# Altium PCB PCB2.PcbDoc (part 2 of 2)
Units mm, origin at the board's own origin, x right, y up, seen from the top; angles counter-clockwise.
Board outline 65.4 x 65.4 mm, 4 copper layers (Top Layer, Internal Plane 1, Signal Layer 1, Bottom Layer), stack 0.778 mm thick; 122 components, 87 nets, 418 pads, 912 vias.
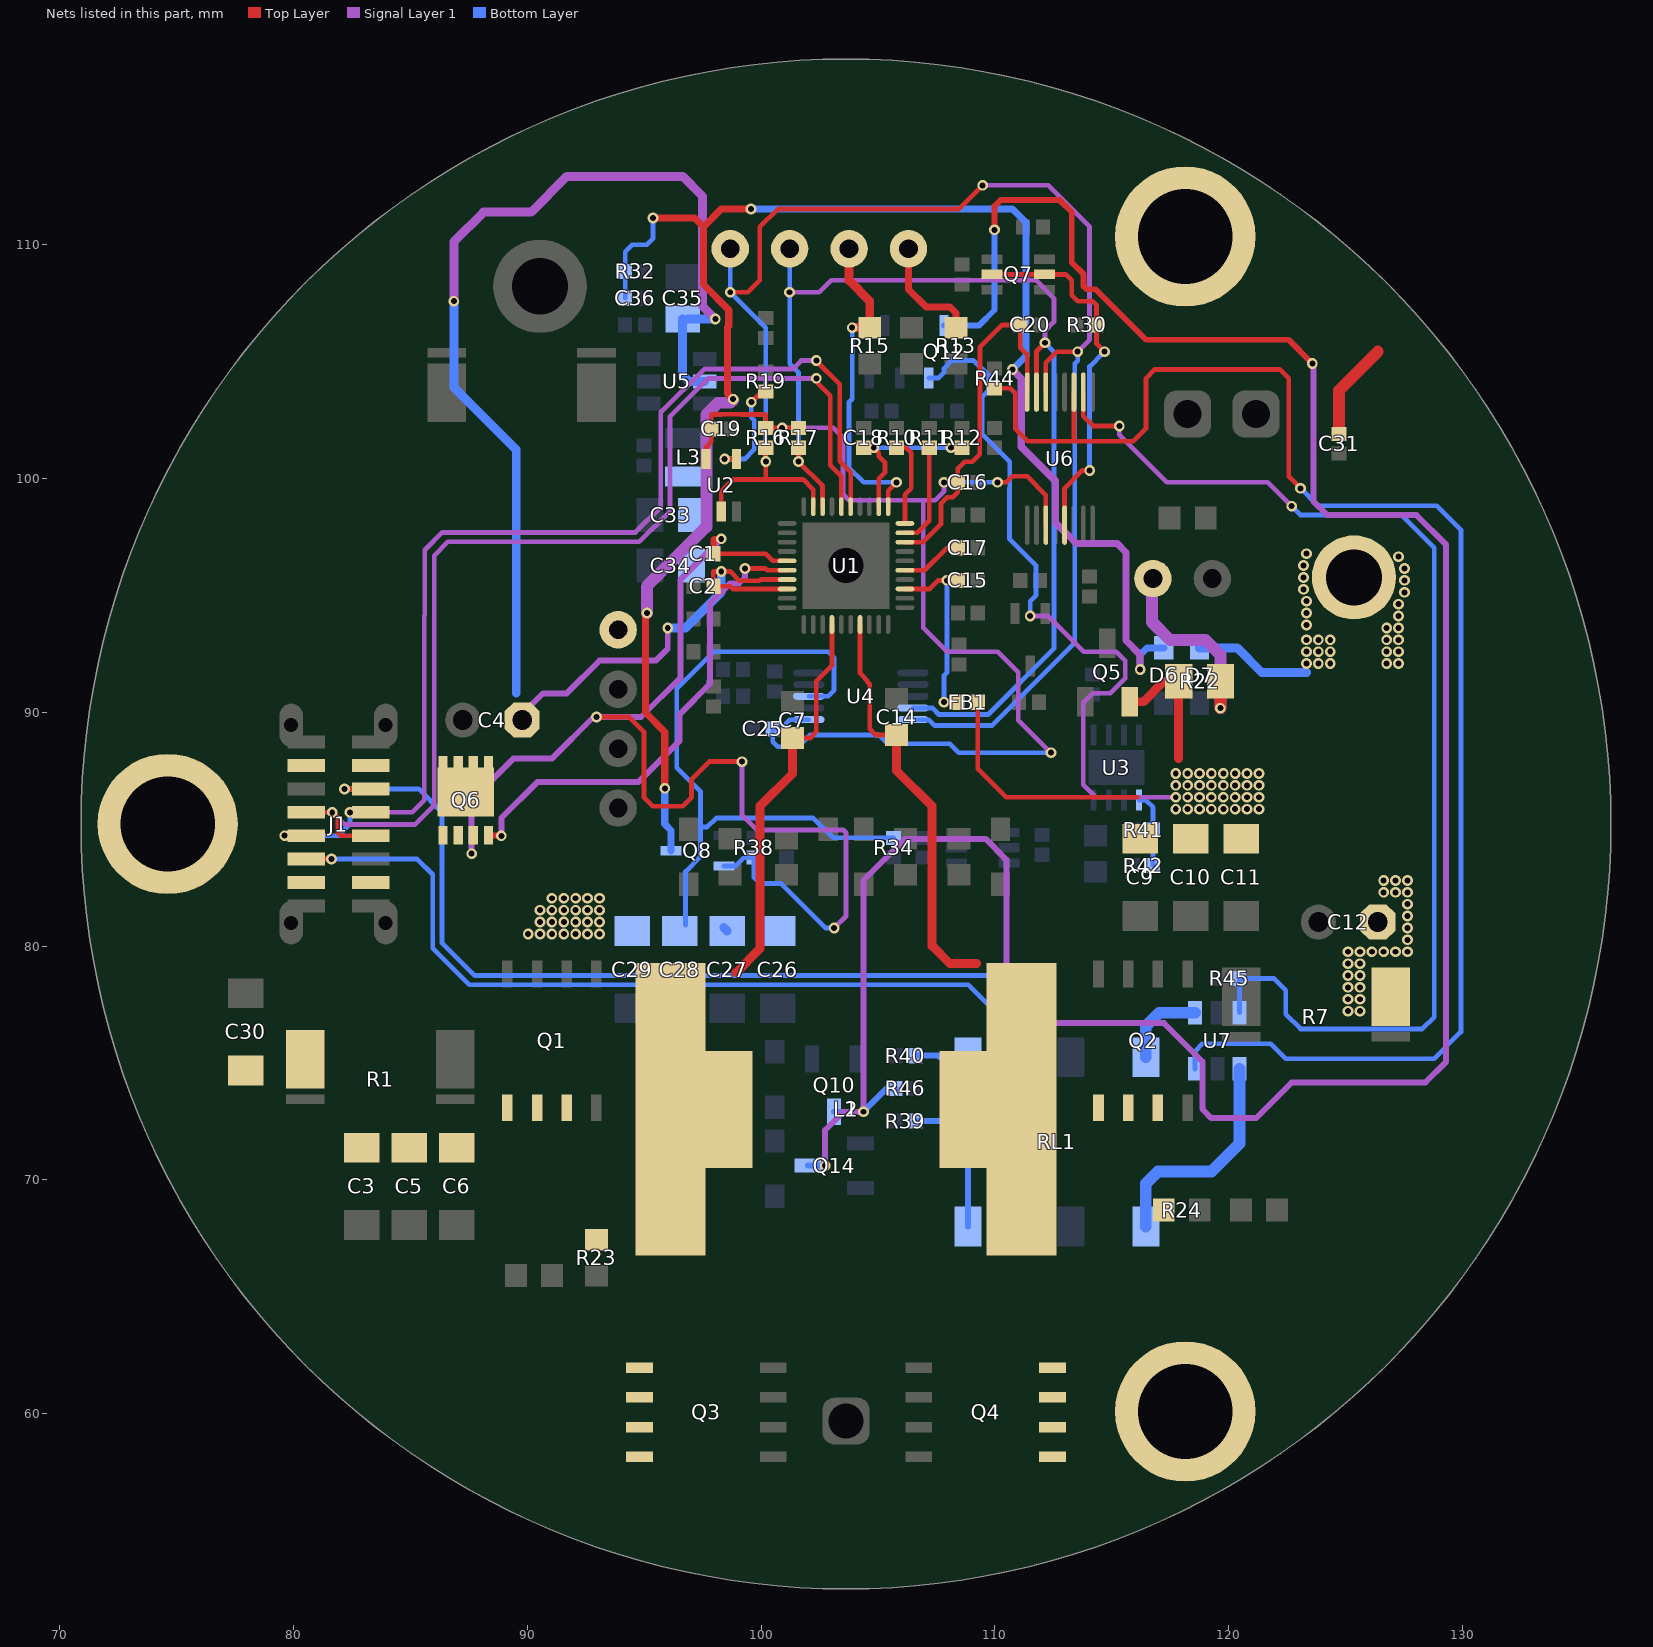
[diagram p4: the nets of this part, all layers, seen from the top]

## Via types
v1: diameter 0.457, hole 0.254, Top Layer to Bottom Layer, tented both sides, 912 vias

## Nets (pads, with @x,y where several pads share a name; then routed paths per layer and width w, separated by ;. In a path a pad name is that pad's centre, name@x,y a point inside that pad or via, vN(x,y) a via of type N, cw(c..) or ccw(c..) an arc to the next point about the centre after c; other vN are vias at no path point) (continued)
NetR19_1: R19.1 U2.4 | length 5
  Top Layer w0.203: v1(98.443,100.82) U2.4@98.948,100.82 ; v1(99.586,103.251) 100.203,103.868 R19.1@100.203,103.715
  Bottom Layer w0.203: v1(98.443,100.82) 99.296,100.82 99.713,101.237 99.713,102.471 99.586,102.598 v1(99.586,103.251)
NetR41_1: R41.1 R42.2 U3.5 | length 3.2
  Bottom Layer w0.203: U3.5@116.164,86.235 116.457,86.235 116.757,85.935 R42.2@116.757,83.439
NTC: C18.2 R12.2 U1.32 | length 7
  Top Layer w0.203: C18.2@104.394,101.302 v1(104.819,101.302) 105.035,101.086 105.035,100.936 105.296,100.675 105.296,100.239 105.035,99.978 105.035,98.789 U1.32@105.032,98.786 ; v1(108.121,101.302) R12.2@108.585,101.302
  Bottom Layer w0.203: v1(104.819,101.302) v1(108.121,101.302)
ODIS: Q10.3 Q12.3 Q14.3 R46.1 | length 112.7
  Top Layer w0.254: v1(109.982,110.617) 109.982,111.633 110.236,111.887 112.776,111.887 113.284,111.379 113.284,109.22 113.792,108.712 113.792,108.204 113.919,108.077 114.3,108.077 116.459,105.918 122.555,105.918 v1(123.571,104.902)
  Signal Layer 1 w0.254: v1(102.743,70.612) 102.743,72.136 103.523,72.916 v1(104.376,72.916) 104.376,82.803 106.155,84.582 109.601,84.582 110.49,83.693 110.49,77.978 111.76,76.708 117.221,76.708 118.872,75.057 118.872,73.025 119.253,72.644 121.158,72.644 122.682,74.168 128.397,74.168 129.286,75.057 129.286,97.155 128.016,98.425 124.206,98.425 123.614,99.017 123.614,104.859 v1(123.571,104.902)
  Bottom Layer w0.254: Q14.3@101.999,70.612 v1(102.743,70.612) ; Q10.3@103.124,72.916 v1(104.376,72.916) 105.374,73.914 R46.1@105.747,73.914 ; Q12.3@107.823,106.535 109.329,106.535 109.982,107.188 v1(109.982,110.617)
OEN: Q7.2 Q7.5 R30.1 U6.5 | length 15.8
  Top Layer w0.203: Q7.2@109.873,108.712 Q7.5@112.123,108.712 113.03,108.712 113.284,108.458 113.284,107.823 113.538,107.569 114.173,107.569 114.344,107.398 R30.1@114.344,106.553 114.344,105.747 v1(114.681,105.41) ; U6.5@112.976,97.994 112.976,99.57 113.736,100.33 v1(114.046,100.33)
  Bottom Layer w0.203: v1(114.046,100.33) 114.046,104.775 v1(114.681,105.41)
PMU_EN: pad.9 R13.2 | length 4.8
  Top Layer w0.305: pad.9@106.303,109.809 106.303,108.073 107.061,107.315 108.077,107.315 108.331,107.061 R13.2@108.331,106.434
PMU_INT: pad.8 R15.2 U1.31 | length 14
  Top Layer w0.203: U1.31@105.432,98.786 105.434,99.465 v1(105.791,99.822)
  Top Layer w0.381: pad.8@103.763,109.809 103.763,108.454 104.648,107.569 R15.2@104.648,106.434 v1(103.894,106.434)
  Bottom Layer w0.203: v1(103.894,106.434) 103.894,103.386 103.759,103.251 103.759,100.457 104.394,99.822 v1(105.791,99.822)
PMU_SCL: pad.6@98.683,109.809 R16.1 U1.39 U2.2 U4.5 U6.14 | length 65.7
  Top Layer w0.203: U2.2@98.298,98.57 98.298,99.441 98.806,99.949 101.798,99.949 102.232,99.515 U1.39@102.232,98.786 ; v1(98.683,107.95) 99.441,107.95 99.949,108.458 99.949,110.744 100.711,111.506 108.458,111.506 v1(109.474,112.522) ; 100.203,99.949 R16.1@100.203,101.302 ; U6.14@112.176,103.682 112.176,104.937 112.649,105.41 v1(113.538,105.41)
  Signal Layer 1 w0.203: v1(109.474,112.522) 112.268,112.522 114.046,110.744 114.046,105.918 v1(113.538,105.41)
  Bottom Layer w0.203: pad.6@98.683,109.809 v1(98.683,107.95) 100.203,106.43 v1(100.203,100.711) ; U4.5@106.492,89.678 107.172,89.678 107.424,89.426 109.873,89.426 113.411,92.964 113.411,104.902 113.538,105.029 v1(113.538,105.41)
PMU_SDA: pad.7 R17.1 U1.38 U4.4 U6.15 | length 48.9
  Top Layer w0.203: R17.1@101.6,101.302 v1(101.6,100.711) 102.632,99.679 U1.38@102.632,98.786 ; U6.15@111.776,103.682 111.776,105.426 v1(112.141,105.791)
  Signal Layer 1 w0.203: v1(101.219,107.95) 102.489,107.95 102.997,108.458 111.76,108.458 112.522,107.696 112.522,106.68 112.141,106.299 v1(112.141,105.791)
  Bottom Layer w0.203: pad.7@101.223,109.809 101.223,104.898 101.6,104.521 v1(101.6,100.711) ; U4.4@106.492,90.178 107.325,90.178 107.605,89.898 109.71,89.898 112.522,92.71 112.522,105.41 v1(112.141,105.791)
PSET: R10.2 U1.30 | length 3.9
  Top Layer w0.203: R10.2@105.791,101.302 106.216,101.302 106.426,101.092 106.426,99.568 106.152,99.294 U1.30@106.152,98.066
RDCC1: R39.1 RL1.4 | length 6.4
  Bottom Layer w0.254: R39.1@106.597,72.517 108.214,72.517 108.849,71.882 RL1.4@108.849,68.01
RDCC2: R40.1 RL1.5 | length 2.3
  Bottom Layer w0.254: R40.1@106.597,75.311 107.569,75.311 107.634,75.246 RL1.5@108.849,75.246
RESET: RL1.8 U7.1 | length 3.7
  Bottom Layer w0.508: RL1.8@116.449,75.246 116.449,76.571 117.024,77.146 U7.1@118.557,77.146
RLRESET: R44.2 U6.11 U7.6 | length 66.2
  Top Layer w0.203: R44.2@109.982,103.842 110.661,103.842 110.871,103.632 110.871,102.108 111.397,101.582 113.411,101.582 ; U6.11@113.376,103.682 113.376,101.617 113.411,101.582 ; v1(123.063,99.568) 122.555,100.076 122.555,104.267 122.174,104.648 116.84,104.648 116.459,104.267 116.459,102.126 115.915,101.582 113.411,101.582
  Bottom Layer w0.203: U7.6@118.557,74.746 118.557,75.504 118.872,75.819 121.793,75.819 122.428,75.184 128.778,75.184 129.921,76.327 129.921,97.79 128.887,98.824 123.807,98.824 v1(123.063,99.568)
RLSET: R45.2 U6.10 U7.3 | length 50.2
  Top Layer w0.203: U6.10@113.776,103.682 113.776,102.653 114.194,102.235 v1(115.316,102.235)
  Signal Layer 1 w0.203: v1(115.316,102.235) 115.316,101.854 117.348,99.822 121.666,99.822 v1(122.682,98.806)
  Bottom Layer w0.203: U7.3@120.44,77.163 U7.3@120.457,77.146 120.457,78.596 R45.2@120.44,78.613 121.92,78.613 122.428,78.105 122.428,77.089 123.063,76.454 128.27,76.454 128.778,76.962 128.778,97.028 127.381,98.425 123.063,98.425 v1(122.682,98.806)
SET: RL1.1 U7.4 | length 9.7
  Bottom Layer w0.508: RL1.1@116.449,68.01 116.449,69.84 116.967,70.358 119.253,70.358 120.457,71.562 U7.4@120.457,74.746
SW1: C7.2 L1.1 L2.1 Q1.1 Q1.2 Q1.3 Q3.5 Q3.6 Q3.7 Q3.8 R23.2 U1.14 | length 17
  Top Layer w0.203: C7.2@101.346,88.892 102.1,88.892 102.362,89.154 102.362,91.313 103.032,91.983 U1.14@103.032,93.746
  Top Layer w0.381: 98.933,78.867 99.949,79.883 99.949,85.979 101.346,87.376 C7.2@101.346,88.892
SW2: C14.1 L1.2 L2.2 Q2.1 Q2.2 Q2.3 Q4.5 Q4.6 Q4.7 Q4.8 R24.2 U1.17 | length 17.7
  Top Layer w0.203: U1.17@104.232,93.746 104.232,91.658 104.539,91.351 104.539,91.295 104.648,91.186 104.648,89.281 104.91,89.019 C14.1@105.791,89.019
  Top Layer w0.381: C14.1@105.791,89.019 105.791,87.503 107.315,85.979 107.315,80.01 108.077,79.248 109.22,79.248
TCC1: J1.A5 RL1.3 | length 43.6
  Top Layer w0.203: J1.A5@80.556,83.717 v1(81.637,83.717) v1@81.661,83.693
  Bottom Layer w0.203: v1(81.637,83.717) 85.302,83.717 85.961,83.058 85.961,79.901 87.521,78.341 108.857,78.341 109.982,77.216 109.982,72.898 111.049,71.831 RL1.3@111.049,68.01
TCC2: J1.B5 RL1.6 | length 39.3
  Top Layer w0.203: v1@82.169,86.741 v1(82.193,86.717) J1.B5@83.308,86.717
  Bottom Layer w0.203: v1(82.193,86.717) 85.368,86.717 86.36,85.725 86.36,80.137 87.757,78.74 109.728,78.74 111.049,77.419 RL1.6@111.049,75.246
USBN: J1.A7 J1.B7 U1.36 | length 46.9
  Top Layer w0.203: J1.A7@80.556,85.717 v1(81.669,85.717) 81.915,85.471 81.915,84.836 82.034,84.717 J1.B7@83.308,84.717 ; v1(102.362,104.267) 102.362,104.122 102.961,103.522 102.961,100.561 103.432,100.091 U1.36@103.432,98.786
  Signal Layer 1 w0.203: v1(81.669,85.717) 82.195,85.191 85.191,85.191 86.027,86.027 86.027,96.695 86.614,97.282 94.798,97.282 96.111,98.595 96.111,102.644 97.734,104.267 v1(102.362,104.267)
USBP: J1.A6 J1.B6 U1.35 | length 48.7
  Top Layer w0.203: v1(79.637,84.717) J1.A6@80.556,84.717 ; v1(82.431,85.717) J1.B6@83.308,85.717 ; v1(102.362,105.029) 102.362,105.011 103.36,104.012 103.36,100.727 103.831,100.256 103.831,98.787 U1.35@103.832,98.786
  Signal Layer 1 w0.203: v1(82.431,85.717) 85.082,85.717 85.598,86.233 85.598,94.125 85.628,94.155 85.628,96.931 86.378,97.681 94.633,97.681 95.712,98.76 95.712,102.809 97.569,104.666 101.346,104.666 101.709,105.029 v1(102.362,105.029)
  Bottom Layer w0.203: v1(79.637,84.717) 81.923,84.717 82.431,85.225 v1(82.431,85.717)
VBAT: C9.2 C10.2 C11.2 C12.1 D7.1 FB1.2 pad.11@125.349,95.758 Q5.2 Q12.2 R7.1 R22.1 | length 51.2
  Top Layer w0.203: FB1.2@109.264,90.424 109.264,87.586 110.49,86.36 116.078,86.36
  Top Layer w0.381: Q5.2@115.758,90.444 116.352,90.444 117.221,91.313 R22.1@117.855,91.313 117.855,88.012
  Signal Layer 1 w0.203: v1(111.506,94.107) 112.268,94.107 113.792,92.583 115.189,92.583 115.57,92.202 115.57,91.44 114.935,90.805 114.173,90.805 113.774,90.406 113.774,86.886 114.3,86.36 v1(117.729,86.36)
  Bottom Layer w0.203: Q12.2@107.173,104.285 107.587,104.285 107.823,104.521 107.823,104.705 108.15,105.032 108.836,105.032 108.839,105.029 109.093,105.029 109.728,104.394 109.728,103.759 109.456,103.487 109.456,101.872 110.635,100.693 110.635,99.586 110.617,99.569 110.617,97.409 111.76,96.266 111.76,94.996 111.506,94.742 v1(111.506,94.107)
  Bottom Layer w0.381: D7.1@118.745,92.747 120.359,92.747 121.412,91.694 123.317,91.694
  other v1: 125.095,77.216 125.603,77.216 125.095,77.724 125.603,77.724 125.095,78.232 125.603,78.232 125.095,78.74 125.603,78.74 125.095,79.248 125.603,79.248 125.095,79.756 125.603,79.756 126.111,79.756 126.619,79.756 127.127,79.756 127.635,79.756 127.635,80.264 127.635,80.772 127.635,81.28 127.635,81.788 126.619,82.296 127.127,82.296 127.635,82.296 126.619,82.804 127.127,82.804 127.635,82.804 117.729,85.852 118.237,85.852 118.745,85.852 119.253,85.852 119.761,85.852 120.269,85.852 120.777,85.852 121.285,85.852 118.237,86.36 118.745,86.36 119.253,86.36 119.761,86.36 120.269,86.36 120.777,86.36 121.285,86.36 117.729,86.868 118.237,86.868 118.745,86.868 119.253,86.868 119.761,86.868 120.269,86.868 120.777,86.868 121.285,86.868 117.729,87.376 118.237,87.376 118.745,87.376 119.253,87.376 119.761,87.376 120.269,87.376 120.777,87.376 121.285,87.376 123.317,92.075 123.825,92.075 124.333,92.075 126.746,92.075 127.254,92.075 123.317,92.583 123.825,92.583 124.333,92.583 126.746,92.583 127.254,92.583 123.317,93.091 123.825,93.091 124.333,93.091 126.746,93.091 127.254,93.091 126.746,93.599 127.254,93.599 123.317,93.726 127.254,94.107 123.317,94.234 127.254,94.615 123.317,94.742 127.508,95.123 123.19,95.25 127.508,95.631 123.19,95.758 127.508,96.139 123.19,96.266 127.254,96.647 123.317,96.774
VBIN: C15.2 FB1.1 U1.23 | length 8.3
  Top Layer w0.203: U1.23@106.152,95.266 107.204,95.266 107.569,95.631 v1(107.95,95.631) C15.2@108.414,95.631 ; v1(107.823,90.424) FB1.1@108.414,90.424
  Bottom Layer w0.203: v1(107.823,90.424) 107.823,91.567 107.95,91.694 v1(107.95,95.631)
VBUS: C2.2 C3.2 C4.1 C5.2 C6.2 C26.2 C27.2 C28.2 C29.2 C30.2 C35.2 Q6.5 Q6.6 Q6.7 Q6.8 R1.0 R34.2 U1.7 U1.8 U4.8 U5.5 | length 92.8
  Top Layer w0.203: U1.8@101.112,95.266 98.79,95.266 98.679,95.377 C2.2@97.961,95.377 97.961,96.012 98.679,96.012 99.078,95.613 99.931,95.613 99.984,95.666 U1.7@101.112,95.666
  Signal Layer 1 w0.254: C4.1@89.789,89.662 89.789,89.916 90.678,90.805 91.694,90.805 93.091,92.202 94.996,92.202 95.504,92.202 96.012,92.71 v1(96.012,93.599)
  Signal Layer 1 w0.381: v1(86.868,107.569) 86.868,110.109 88.138,111.379 90.17,111.379 91.694,112.903 96.647,112.903 97.497,112.053 97.497,107.354 v1(98.044,106.807)
  Bottom Layer w0.203: C28.2@96.774,80.899 96.774,83.185 97.409,83.82 97.409,85.09 97.703,85.09 98.084,85.471 102.235,85.471 103.08,84.626 R34.2@105.664,84.626 ; 97.409,84.201 97.409,86.614 96.393,87.63 96.393,90.995 96.965,91.567 96.972,91.567 97.988,92.583 102.87,92.583 103.124,92.329 103.124,90.932 102.87,90.678 U4.8@102.042,90.678
  Bottom Layer w0.381: v1(86.868,107.569) 86.868,103.886 89.535,101.219 89.535,90.805 ; v1(96.012,93.599) 96.774,93.599 98.298,95.123 v1(98.298,96.012) ; C35.2@96.647,106.806 96.647,104.394 96.901,104.14 U5.5@97.593,104.14 ; C35.2@96.901,106.806 96.902,106.807 v1(98.044,106.807) ; C27.2@98.407,80.79 C27.2@98.552,80.645
  other v1: 90.043,80.518 90.551,80.518 91.059,80.518 91.567,80.518 92.075,80.518 92.583,80.518 93.091,80.518 90.551,81.026 91.059,81.026 91.567,81.026 92.075,81.026 92.583,81.026 93.091,81.026 90.551,81.534 91.059,81.534 91.567,81.534 92.075,81.534 92.583,81.534 93.091,81.534 91.059,82.042 91.567,82.042 92.075,82.042 92.583,82.042 93.091,82.042
VBUSG: Q6.4 U1.6 | length 20.8
  Top Layer w0.203: v1(99.314,96.139) 100.203,96.139 100.276,96.066 U1.6@101.112,96.066
  Top Layer w0.254: Q6.4@88.351,84.733 v1@88.876,84.733
  Signal Layer 1 w0.254: v1(88.9,84.709) 88.9,85.471 90.451,87.022 94.769,87.022 96.52,88.773 96.52,89.916 97.816,91.212 97.816,94.641 98.679,95.504 99.06,95.504 99.314,95.758 v1(99.314,96.139)
VCASE: C31.2 pad.3 pad.4 pad.5 | length 4.2
  Top Layer w0.508: C31.2@124.714,101.898 124.714,103.759 126.365,105.41
VCC5V: C17.1 U1.25 | length 2.7
  Top Layer w0.203: U1.25@106.152,96.066 106.988,96.066 107.95,97.028 C17.1@108.414,97.028
VCCIO: C16.1 C19.2 C20.2 C25.1 R16.2 R17.2 U1.28 U2.5 U4.6 U6.3 U6.16 | length 67.8
  Top Layer w0.203: U2.5@97.648,100.82 97.648,101.331 97.873,101.556 C19.2@97.873,102.108 97.873,102.725 98.295,102.725 98.3,102.73 99.146,102.73 99.151,102.725 100.203,102.725 R16.2@100.203,102.152 v1(100.901,102.152) R17.2@101.6,102.152 ; U1.28@106.152,97.266 106.918,97.266 107.696,98.044 107.696,98.933 107.95,99.187 108.204,99.187 108.414,99.397 C16.1@108.414,99.822 ; v1(107.823,99.822) C16.1@108.414,99.822 ; v1(110.109,99.822) 110.49,99.822 110.747,100.079 111.376,100.079 112.176,99.279 U6.3@112.176,97.994 ; U6.16@111.376,103.682 111.376,105.286 111.081,105.581 C20.2@111.081,106.553 110.312,106.553 109.36,105.601 109.36,103.728 109.347,103.715 109.347,101.019 109.033,100.705 108.706,100.705 108.414,100.413 C16.1@108.414,99.822
  Signal Layer 1 w0.203: v1(100.901,102.152) 103.08,102.152 103.505,101.727 103.505,99.314 103.759,99.06 106.934,99.06 ; v1(107.823,99.822) 107.823,99.441 107.442,99.06 106.934,99.06 ; v1(112.395,88.265) 110.998,89.662 110.998,91.694 110.109,92.583 107.95,92.583 106.934,93.599 106.934,99.06
  Bottom Layer w0.203: U4.6@102.042,89.678 101.235,89.678 100.838,89.281 C25.1@100.501,89.281 100.501,88.729 100.711,88.519 101.6,88.519 102.108,89.027 105.029,89.027 105.41,88.646 108.077,88.646 108.458,88.265 v1(112.395,88.265) ; v1(107.823,99.822) v1(110.109,99.822)
VCMS: pad.6@116.753,95.709 R22.2 | length 8.8
  Top Layer w0.508: v1(119.635,90.171) R22.2@119.635,91.313
  Signal Layer 1 w0.508: pad.6@116.753,95.709 116.713,95.669 116.713,93.853 117.475,93.091 118.999,93.091 119.635,92.455 v1(119.635,90.171)
VIN: C1.2 J1.2 Q6.1 Q6.2 Q6.3 Q8.2 R38.2 U1.5 | length 52.9
  Top Layer w0.203: v1(92.964,89.789) 94.361,89.789 94.996,89.154 94.996,86.36 95.377,85.979 96.647,85.979 97.028,86.36 97.028,87.122 97.79,87.884 v1(99.187,87.884) ; C1.2@97.961,96.774 100.203,96.774 100.511,96.466 U1.5@101.112,96.466
  Top Layer w0.254: C1.2@97.961,96.774 97.961,97.365 98.005,97.409 v1(98.298,97.409)
  Signal Layer 1 w0.203: v1(99.187,87.884) 99.187,85.598 99.822,84.963 103.505,84.963 103.632,84.836 103.632,81.28 v1(103.124,80.772)
  Signal Layer 1 w0.254: v1(87.63,83.947) 87.63,86.233 89.408,88.011 91.059,88.011 92.837,89.789 94.869,89.789 96.563,91.483 96.563,95.674 v1(98.298,97.409)
  Bottom Layer w0.203: Q8.2@98.407,83.424 98.918,83.424 99.27,83.776 R38.2@99.695,83.776 99.695,82.931 99.949,82.677 100.838,82.677 102.743,80.772 v1(103.124,80.772)
VSCREEN: C33.2 C34.2 C36.2 D6.1 L3.1 pad.6@93.893,93.519 Q8.3 R32.2 | length 75.6
  Top Layer w0.305: v1(95.123,94.234) 95.054,94.165 95.054,89.985 95.885,89.154 v1(95.885,86.741) ; v1(95.377,111.125) 97.153,111.125 97.535,110.743 ; v1(98.806,103.378) 98.57,103.614 98.57,106.467 98.621,106.517 98.621,107.197 97.535,108.283 97.535,110.743 ; v1(99.568,111.506) 98.298,111.506 97.535,110.743
  Signal Layer 1 w0.203: 98.095,103.302 98.171,103.378 v1(98.806,103.378)
  Signal Layer 1 w0.305: v1(110.744,104.648) 111.125,104.267 111.125,101.345 112.58,99.89 112.58,98.112 113.487,97.205 115.228,97.205 115.605,96.828 115.605,93.056 116.205,92.456 v1(116.205,91.821)
  Signal Layer 1 w0.508: v1(95.123,94.234) 95.123,95.377 97.663,97.917 97.663,102.718 98.171,103.226 98.69,103.226 v1@98.806,103.342
  Bottom Layer w0.203: C36.2@94.19,107.696 R32.2@94.19,108.839 94.19,109.684 94.488,109.982 95.123,109.982 95.377,110.236 v1(95.377,111.125)
  Bottom Layer w0.305: v1(95.885,86.741) 95.885,85.217 96.157,84.945 Q8.3@96.157,84.074 ; v1(99.568,111.506) 110.744,111.506 111.321,110.929 111.321,105.225 v1(110.744,104.648) ; v1(116.205,91.821) 116.205,92.456 116.496,92.747 D6.1@117.221,92.747
VSET: R11.2 U1.29 | length 4.4
  Top Layer w0.203: U1.29@106.152,97.666 106.683,97.666 107.188,98.171 R11.2@107.188,101.302
pads on no net: J1.A8 J1.B8 U1.1 U1.2 U1.3 U1.4 U1.24 U1.40 U2.1 U3.3 U3.6 U3.7 U4.3 U6.13

## Polygon pours and split planes (outlines as drawn)
GND on Top Layer "Component Side-No Net 1" (solid, remove dead copper, pour order 135): 62.865,127.635 128.778,127.635 134.874,121.539 140.335,116.078 140.335,70.485 140.335,58.293 130.556,48.514 125.984,43.942 55.245,43.942
NetQ1_5 on Top Layer "Component Side-No Net 1" (solid, remove dead copper, pour order 71): 85.979,73.914 85.979,79.629 86.233,79.883 90.551,79.883 90.551,74.041 90.424,73.914
VCASE on Top Layer "Component Side-No Net 1" (solid, remove dead copper, pour order 103): 124.24,107.195 122.7,108.084 ccw(c121.684,106.324) 119.924,107.34 cw(c118.604,108.102) 117.842,106.782 115.643,108.052 115.203,108.306 cw(c116.028,109.736) 114.598,110.562 ccw(c112.949,111.514) 113.901,113.164 112.361,114.053 113.377,115.813 cw(c113.927,115.495) 114.245,116.045 124.693,110.013 125.023,109.822 ccw(c125.341,110.372) 125.891,110.054
VCASE on Top Layer "Component Side-No Net 1" (solid, remove dead copper, pour order 104): 74.295,92.075 74.295,90.297 ccw(c76.327,90.297) 76.327,88.265 cw(c76.327,86.741) 77.851,86.741 77.851,84.201 77.851,83.693 cw(c76.2,83.693) 76.2,82.042 ccw(c76.2,80.137) 74.295,80.137 74.295,78.359 72.263,78.359 cw(c72.263,78.994) 71.628,78.994 71.628,91.059 71.628,91.44 ccw(c70.993,91.44) 70.993,92.075
VCASE on Top Layer "Component Side-No Net 1" (solid, remove dead copper, pour order 102): 67.945,124.333 130.429,124.333 132.969,121.793 138.049,116.713 138.049,70.104 138.049,56.642 131.191,49.784 66.342,49.784
GND on Top Layer "Component Side-No Net 1" (solid, remove dead copper, pour order 95): 97.155,81.788 112.522,81.788 112.776,82.042 112.552,82.266 112.552,93.57 101.698,93.57 100.838,92.71 97.155,89.027 97.155,88.265
GND on Top Layer "Component Side-No Net 1" (solid, remove dead copper, pour order 62): 80.264,70.104 88.265,70.104 89.154,69.215 88.519,68.58 88.519,66.421 81.915,66.421 81.788,66.548
VIN on Top Layer "Component Side-No Net 1" (solid, remove dead copper, pour order 57): 79.756,88.011 85.852,88.011 85.852,84.836 85.852,82.423 81.661,82.423 79.756,82.423 79.756,83.058 84.328,83.058 84.455,83.185 84.455,86.741 84.455,87.122 84.201,87.376 80.264,87.376 79.756,87.376
VIN on Top Layer "Component Side-No Net 1" (solid, remove dead copper, pour order 58): 85.725,85.217 87.884,85.217 87.884,82.423 85.471,82.423
VBUS on Top Layer "Component Side-No Net 1" (solid, remove dead copper, pour order 60): 86.106,88.011 86.106,88.773 88.646,88.773 88.646,90.805 90.932,90.805 91.186,90.551 91.186,88.265 92.456,86.995 92.456,84.455 93.345,83.566 93.345,80.518 93.345,79.883 93.218,79.756 91.948,79.756 88.773,79.756 88.519,79.502 88.138,79.121 87.63,79.121 87.138,78.629 87.138,77.359 86.868,77.089 84.963,77.089 84.582,77.47 84.582,82.55 87.757,82.55 87.884,82.423 86.106,84.201 86.106,84.709
NetQ1_5 on Top Layer "Component Side-No Net 1" (solid, remove dead copper, pour order 65): 85.979,73.914 93.218,73.914 93.472,74.168 93.726,74.422 93.726,79.121 93.726,79.502 93.345,79.883 93.218,79.756 88.773,79.756 88.138,79.121 88.138,77.47 88.138,77.216 88.011,77.089 85.979,77.089
VBUS on Top Layer "Component Side-No Net 1" (solid, remove dead copper, pour order 66): 84.582,78.867 84.455,78.74 79.883,78.74 79.629,78.486 79.629,75.184 79.629,73.914 81.534,73.914 85.725,73.914 85.979,74.168 86.106,74.295 86.106,77.216 86.106,77.597 87.249,78.74
VBUS on Top Layer "Component Side-No Net 1" (solid, remove dead copper, pour order 70): 81.153,74.041 82.296,72.898 82.296,72.644 82.296,72.39 82.169,72.263 82.169,70.612 87.757,70.612 87.757,72.136 87.757,73.152 87.452,73.457 85.649,73.457 85.649,74.625 85.598,74.676 84.582,75.692 81.28,75.692
SW1 on Top Layer "Component Side-No Net 1" (solid, remove dead copper, pour order 72): 88.011,73.787 88.011,67.818 88.646,67.183 89.027,66.802 94.234,66.802 97.79,66.802 97.663,66.929 97.663,79.375 97.409,79.629 96.901,79.629 91.567,79.629 88.646,79.629 88.138,79.121
SW1 on Top Layer "Component Side-No Net 1" (solid, remove dead copper, pour order 73): 94.361,57.404 94.107,57.404 94.107,61.595 94.107,66.294 92.964,67.437 93.98,68.453 93.98,72.771 93.98,78.867 94.742,79.629 99.187,79.629 99.441,79.629 99.695,79.375 99.441,79.121 99.441,61.087 99.441,57.404
SW1 on Top Layer "Component Side-No Net 1" (solid, remove dead copper, pour order 74): 99.695,79.375 99.695,62.738 98.933,61.976 96.52,61.976 96.52,79.502
SW2 on Top Layer "Component Side-No Net 1" (solid, remove dead copper, pour order 77): 107.569,79.756 113.157,79.756 113.284,79.756 113.538,79.502 113.538,78.359 113.538,74.803 113.919,74.422 115.443,74.422 117.602,74.422 117.856,74.168 117.856,72.644 117.856,67.564 117.094,66.802 116.967,66.675 113.03,66.675 107.569,66.675
SW2 on Top Layer "Component Side-No Net 1" (solid, remove dead copper, pour order 79): 107.569,66.802 107.569,63.246 107.569,62.992 108.077,62.484 108.077,62.357 108.077,57.404 112.268,57.404 112.903,57.404 113.284,57.785 113.411,57.912 113.411,59.69 113.411,63.373 114.046,64.008 114.427,64.389 115.443,64.389 115.824,64.389 117.729,66.294 117.856,66.421 117.856,68.199 117.856,70.739 117.221,71.374 116.525,72.07 107.569,72.07
NetQ2_5 on Top Layer "Component Side-No Net 1" (solid, remove dead copper, pour order 81): 113.538,79.502 113.538,79.883 113.919,80.264 121.285,80.264 121.412,80.264 121.539,80.137 121.666,80.01 121.666,78.105 121.666,76.708 121.412,76.454 120.015,76.454 119.507,76.454 119.253,76.2 119.253,75.311 119.253,74.676 118.999,74.422 117.094,74.422 113.919,74.422 113.538,74.803
GND on Top Layer "Component Side-No Net 1" (solid, remove dead copper, pour order 82): 114.935,82.804 124.079,82.804 124.587,82.296 124.714,82.169 124.714,80.391 124.714,80.264 124.46,80.01 117.475,80.01 115.316,80.01 114.808,80.518
VBAT on Top Layer "Component Side-No Net 1" (solid, remove dead copper, pour order 84): 115.189,85.471 126.619,85.471 127.254,84.836 128.016,84.074 128.016,77.851 128.016,76.708 127.889,76.581 126.492,76.581 125.222,76.581 124.968,76.835 124.714,77.089 124.714,77.978 124.714,82.169 124.333,82.55 124.333,82.931 115.443,82.931 115.189,83.185
VBAT on Top Layer "Component Side-No Net 1" (solid, remove dead copper, pour order 86): 115.189,83.185 115.189,86.741 116.459,86.741 116.459,88.265 116.713,88.519 120.396,88.519 121.412,88.519 122.301,89.408 122.809,89.916 122.809,94.488 122.809,97.155 123.444,97.79 123.698,98.044 126.619,98.044 127.381,98.044 128.016,97.409 128.016,83.82 128.016,79.756 127.762,80.01 125.095,80.01 115.824,80.01 115.062,80.772
GND on Top Layer "Component Side-No Net 1" (solid, remove dead copper, pour order 91): 79.502,82.169 84.709,82.169 84.709,78.994 84.455,78.74 84.328,78.867 79.375,78.867
GND on Top Layer "Component Side-No Net 1" (solid, remove dead copper, pour order 92): 85.725,104.902 87.63,104.902 88.011,104.521 88.392,104.14 88.392,100.838 88.392,91.059 88.646,90.805 88.646,88.773 86.106,88.773 86.106,88.011 84.963,88.011 84.836,88.138 84.582,88.392 83.693,88.392 79.502,88.392 79.375,88.519 79.375,91.313 79.375,97.663 80.899,99.187 82.677,99.187 83.058,99.187 83.439,99.568 83.82,99.949 83.82,104.14 84.582,104.902
GND on Top Layer "Component Side-No Net 1" (solid, remove dead copper, pour order 97): 99.314,69.215 108.331,69.215 108.839,68.707 108.331,68.199 108.331,57.404 97.917,57.404 97.663,57.658 97.536,57.785 97.536,69.215
CHG- on Top Layer "Component Side-No Net 1" (solid, remove dead copper, pour order 100): 92.075,105.029 92.075,98.552 96.393,98.552 96.901,99.06 96.901,104.521 96.901,108.966 96.012,109.855 95.631,110.236 89.916,110.236 88.773,110.236 88.392,109.855 88.265,109.728 88.265,108.204 88.265,107.315 88.646,106.934 88.773,106.807 88.773,106.172 88.773,105.791 89.027,105.537 89.154,105.664 91.44,105.664 93.726,105.664 93.853,105.537 93.726,105.41 93.726,105.029
GND on Top Layer "Component Side-No Net 1" (solid, remove dead copper, pour order 105): 80.772,72.39 82.296,72.39 82.55,72.136 88.646,72.136 88.646,68.326 87.757,67.437 80.772,67.437
GND on Top Layer "Component Side-No Net 1" (solid, remove dead copper, pour order 110): 78.105,82.169 78.232,82.042 85.217,82.042 85.217,78.74 77.597,78.74
GND on Top Layer "Component Side-No Net 1" (solid, remove dead copper, pour order 111): 77.851,88.519 85.725,88.519 85.725,91.694 77.216,91.694 76.708,92.202
VBUS on Top Layer "Component Side-No Net 1" (solid, remove dead copper, pour order 76): 79.629,73.914 77.089,73.914 77.089,76.327 77.089,76.454 80.518,76.454 80.518,74.041 80.391,73.914
GND on Top Layer "Component Side-No Net 1" (solid, remove dead copper, pour order 83): 76.073,76.835 79.248,76.835 79.248,79.629 76.073,79.629 75.692,80.01
GND on Bottom Layer "Component Side-No Net 1" (solid, remove dead copper, pour order 147): 113.735,88.383 117.339,88.383 117.348,88.392 117.094,88.138 117.094,86.868 113.29,86.868 113.275,86.853 113.275,88.383
GND on Bottom Layer "Component Side-No Net 1" (solid, remove dead copper, pour order 145): 67.437,125.984 132.334,125.984 142.621,115.697 142.875,115.443 142.875,62.23 142.875,58.674 130.81,46.609 129.794,45.593 88.392,45.593 74.422,45.593 59.817,60.198 62.484,62.865 62.484,116.332
GND on Bottom Layer "Component Side-No Net 1" (solid, remove dead copper, pour order 143): 99.949,68.58 101.219,68.58 101.219,70.104 103.378,70.104 103.378,69.088 105.283,69.088 105.283,70.104 107.315,70.104 107.315,62.992 108.077,62.23 108.077,58.332 107.354,58.332 106.426,57.404 106.172,57.15 97.028,57.15
GND on Bottom Layer "Component Side-No Net 1" (solid, remove dead copper, pour order 141): 77.216,106.553 87.884,106.553 90.551,103.886 93.218,101.219 93.218,93.218 93.218,88.011 101.6,79.629 101.727,79.502 101.727,76.454 99.949,76.454 99.949,66.802 99.949,62.103 100.33,61.722 100.457,61.595 108.077,61.595 108.077,51.816 106.553,50.292 71.247,50.292 71.247,72.263 70.104,73.406 70.104,101.219 71.374,102.87 73.279,104.775
GND on Bottom Layer "Component Side-No Net 1" (solid, remove dead copper, pour order 119): 118.872,80.772 120.777,80.772 121.285,80.772 121.92,80.137 124.841,80.137 124.841,83.185 124.714,83.312 120.65,83.312 118.872,83.312
NetC38_1 on Bottom Layer "Component Side-No Net 1" (solid, remove dead copper, pour order 117): 114.3,88.519 114.427,88.519 114.427,90.043 114.427,90.17 115.316,90.17 115.697,89.789 119.253,89.789 119.253,90.932 116.078,90.932 115.951,90.932 115.57,91.313 114.681,91.313 113.919,91.313 113.792,91.186 113.792,89.281 113.792,88.519
5V on Bottom Layer "Component Side-No Net 1" (solid, remove dead copper, pour order 115): 113.919,86.741 114.554,86.741 114.554,85.852 114.554,85.598 114.681,85.471 114.808,85.344 116.332,85.344 116.332,84.201 113.792,84.201 113.792,86.741
GND on Bottom Layer "Component Side-No Net 1" (solid, remove dead copper, pour order 99): 92.583,106.172 91.567,107.188 91.567,110.363 91.567,112.522 91.821,112.776 91.948,112.903 96.266,112.903 97.155,112.903 97.663,112.395 98.683,111.375 98.683,107.95 98.683,107.573 98.171,107.061 96.393,105.283 96.393,102.87 95.758,102.235 95.123,101.6 95.123,100.711 92.202,100.711 91.567,101.346
VSCREEN on Bottom Layer "Component Side-No Net 1" (solid, remove dead copper, pour order 94): 92.511,94.924 92.511,91.346 92.404,91.239 92.457,91.186 95.504,91.186 97.917,93.599 98.171,93.853 98.171,96.52
VSCREEN on Bottom Layer "Component Side-No Net 1" (solid, remove dead copper, pour order 89): 95.682,100.768 96.45,100.768 96.774,101.092 96.901,101.219 97.917,101.219 97.917,99.441 97.663,99.187 97.663,96.139 97.663,94.869 96.901,94.107 96.393,93.599 95.504,93.599 94.615,92.71 94.488,92.583 93.599,92.583 93.091,92.583 92.837,92.837 92.71,92.964 92.71,95.377 93.853,96.52 93.853,97.536 94.488,97.536 95.123,98.171 94.996,98.298 94.996,100.54
GND on Bottom Layer "Component Side-No Net 1" (solid, remove dead copper, pour order 85): 95.559,99.949 95.559,99.513 95.885,99.187 95.885,96.012 95.885,95.504 95.504,95.123 92.583,95.123 91.567,95.123 91.567,97.028
CHG- on Bottom Layer "Component Side-No Net 1" (solid, remove dead copper, pour order 80): 94.306,98.552 94.107,98.751 94.107,102.743 94.107,103.387 93.345,104.149 93.345,105.359 93.345,105.41 92.583,106.172 92.583,110.236 88.646,110.236 88.265,109.855 88.265,109.728 88.265,106.01 88.483,105.791 89.119,105.156 90.043,105.156 90.043,104.013 91.821,102.235 91.694,102.108 91.694,98.552
ASW on Bottom Layer "Component Side-No Net 1" (solid, remove dead copper, pour order 78): 94.361,100.965 95.377,100.965 95.377,102.235 95.758,102.235 95.885,102.362 96.266,102.743 96.393,102.87 96.393,103.505 98.171,103.505 98.171,101.727 98.171,101.6 97.917,101.346 97.663,101.092 97.155,101.092 96.774,101.092 96.52,100.838 96.266,100.584 95.758,100.584 95.504,100.33 95.559,100.275 95.559,99.949 94.488,99.949 94.361,100.076
GND on Bottom Layer "Component Side-No Net 1" (solid, remove dead copper, pour order 75): 91.44,94.996 91.567,95.123 95.758,95.123 95.758,100.076 95.631,99.949 91.186,99.949
GND on Bottom Layer "Component Side-No Net 1" (solid, remove dead copper, pour order 96): 100.584,98.679 105.664,98.679 106.045,98.298 105.918,98.171 105.918,94.234 100.33,94.234 100.076,94.488
VBAT on Bottom Layer "Component Side-No Net 1" (solid, remove dead copper, pour order 87): 117.348,87.63 117.348,85.471 117.602,85.217 117.856,84.963 121.031,84.963 123.063,84.963 124.587,83.439 124.841,83.185 124.841,81.407 124.841,77.089 124.968,76.962 126.873,76.962 127.762,76.962 128.016,77.216 128.016,82.169 128.016,96.52 127.508,97.028 127.127,97.409 125.095,97.409 123.444,97.409 122.809,96.774 122.809,89.916 122.809,89.281 121.539,88.011 117.729,88.011
VBUS on Bottom Layer "Component Side-No Net 1" (solid, remove dead copper, pour order 101): 88.428,90.841 90.515,90.841 90.932,90.424 91.186,90.17 91.186,88.773 91.186,87.376 91.948,86.614 92.075,86.487 92.075,84.709 92.202,84.709 93.345,83.566 93.345,80.899 93.345,80.391 93.218,80.264 93.091,80.137 90.805,80.137 87.63,80.137 87.376,80.391 86.995,80.772 86.995,91.059
CHG- on Bottom Layer "Component Side-No Net 1" (solid, remove dead copper, pour order 106): 91.948,98.552 90.551,98.552 90.678,98.679 90.678,103.505 89.281,103.505 88.9,103.886 88.392,104.394 88.392,106.68 92.075,106.68 92.837,105.918 93.345,105.41 93.345,98.806 93.345,98.552
GND on Bottom Layer "Component Side-No Net 1" (solid, remove dead copper, pour order 109): 77.851,91.694 80.772,91.694 81.026,91.44 80.899,91.313 80.899,78.486 78.232,78.486 77.724,78.994
VBUS on Bottom Layer "Component Side-No Net 1" (solid, remove dead copper, pour order 63): 93.345,82.169 100.711,82.169 101.727,81.153 101.727,79.883 101.727,79.756 101.473,79.502 101.346,79.375 99.949,79.375 88.265,79.375 87.884,79.756 86.995,80.645 86.995,83.312
VSCREEN on Signal Layer 1 "Component Side-No Net 1" (solid, remove dead copper, pour order 157): 91.567,92.329 96.52,92.329 96.52,94.742 96.139,95.123 95.758,94.742 91.059,94.742
BATT- on Signal Layer 1 "Component Side-No Net 1" (solid, remove dead copper, pour order 155): 92.329,92.075 96.309,92.075 96.563,92.329 96.52,92.286 96.52,89.916 92.202,89.916 91.567,89.281
GND on Signal Layer 1 "Component Side-No Net 1" (solid, remove dead copper, pour order 153): 73.787,93.98 75.438,92.329 85.598,92.329 85.598,80.339 86.332,79.605 100.913,65.024 107.95,65.024 107.95,52.324 107.061,51.435 106.426,52.07 72.517,52.07 67.564,52.07 61.849,57.785 61.976,57.912 61.976,90.805
GND on Signal Layer 1 "Component Side-No Net 1" (solid, remove dead copper, pour order 151): 105.664,68.707 107.442,66.929 133.096,66.929 133.096,56.261 125.222,48.387 124.206,49.403 78.994,49.403 78.994,64.77 75.057,68.707
GND on Signal Layer 1 "Component Side-No Net 1" (solid, remove dead copper, pour order 149): 124.482,65.483 74.217,65.483 65.278,74.422 64.516,75.184 64.516,106.426 64.516,110.109 74.041,119.634 78.867,124.46 120.015,124.46 137.668,124.46 139.827,122.301 145.923,116.205 145.923,88.646 145.923,70.358 140.97,65.405
GND on Signal Layer 1 "Component Side-No Net 1" (solid, remove dead copper, pour order 139): 99.695,99.06 100.711,98.044 122.047,98.044 122.047,91.567 121.92,91.44 121.539,91.821 100.076,91.821
GND on Signal Layer 1 "Component Side-No Net 1" (solid, remove dead copper, pour order 129): 69.088,96.266 89.535,96.266 91.059,94.742 95.885,89.916 95.885,73.787 101.854,73.787 111.252,64.389 111.252,55.88 110.109,55.88 108.839,54.61 107.569,55.88 68.199,55.88
VBUS on Signal Layer 1 "Component Side-No Net 1" (solid, remove dead copper, pour order 107): 89.955,81.616 ccw(c89.955,82.729) 91.068,82.729 ccw(c91.12,82.729) 91.12,82.677 93.853,82.677 ccw(c93.853,82.55) 93.726,82.55 93.726,80.01 cw(c93.472,80.01) 93.472,79.756 89.281,79.756
CHG- on Signal Layer 1 "Component Side-No Net 1" (solid, remove dead copper, pour order 90): 88.138,110.109 88.138,109.855 88.138,106.553 88.138,105.74 88.519,105.359 88.519,99.568 88.519,98.207 88.646,98.08 94.468,98.08 95.313,98.925 95.313,102.9 95.885,103.471 95.885,105.642 95.885,109.982 95.631,110.236 95.377,110.49 88.519,110.49
VBAT on Signal Layer 1 "Component Side-No Net 1" (solid, remove dead copper, pour order 88): 117.348,87.63 117.348,85.598 117.602,85.344 120.65,85.344 123.063,85.344 124.587,83.82 125.095,83.312 125.095,81.28 125.095,80.391 124.841,80.137 124.841,78.74 124.841,76.962 124.968,76.835 126.746,76.835 128.143,76.835 128.143,88.265 128.143,96.774 127.508,97.409 123.571,97.409 123.19,97.409 122.809,97.028 122.809,89.027 122.809,88.519 122.301,88.011 122.174,87.884 117.602,87.884
GND on Signal Layer 1 "Component Side-No Net 1" (solid, remove dead copper, pour order 108): 120.142,84.074 120.396,83.82 125.984,83.82 125.984,79.629 125.095,78.74 124.841,78.486 121.158,78.486
VSCREEN on Signal Layer 1 "Component Side-No Net 1" (solid, remove dead copper, pour order 112): 92.075,94.869 94.615,97.409 98.298,97.409 98.298,93.192 97.816,92.71 97.562,92.456 91.313,92.456
BATT- on Signal Layer 1 "Component Side-No Net 1" (solid, remove dead copper, pour order 59): 92.456,92.202 92.456,88.646 97.11,88.646 97.603,89.139 97.282,89.461 97.282,94.234
VBUS on Internal Plane 1 (split plane): 91.692,90.37 91.692,84.963 91.701,84.913 91.729,84.871 93.851,82.75 93.851,80.445 93.037,79.631 89.589,79.631 89.41,79.81 89.41,81.988 90.135,82.712 90.163,82.754 90.172,82.804 90.172,85.598 90.163,85.648 90.135,85.69 88.521,87.303 88.521,90.497 88.954,90.93 91.132,90.93
VBAT on Internal Plane 1 (split plane): 128.268,96.593 128.268,79.429 128.089,79.25 126.619,79.25 126.569,79.241 126.527,79.213 126.019,78.705 125.991,78.663 125.982,78.613 125.982,77.016 125.93,76.964 124.768,76.964 124.462,77.27 124.462,79.829 125.187,80.553 125.215,80.595 125.224,80.645 125.224,82.423 125.215,82.473 125.187,82.515 122.393,85.309 122.351,85.337 122.301,85.346 117.402,85.346 117.096,85.652 117.096,87.576 117.275,87.755 121.539,87.755 121.589,87.764 121.631,87.792 122.52,88.681 122.548,88.723 122.557,88.773 122.557,96.847 123.244,97.534 127.327,97.534
CHG- on Internal Plane 1 (split plane): 94.74,107.896 94.74,98.479 94.307,98.046 91.875,98.046 91.569,98.352 91.569,104.648 91.56,104.698 91.532,104.74 90.008,106.264 89.966,106.292 89.916,106.301 89.208,106.301 88.394,107.115 88.394,109.674 89.081,110.361 92.275,110.361
GND on Internal Plane 1 (split plane): 105.317,117.373 106.998,117.241 108.669,117.021 110.327,116.714 111.966,116.32 113.583,115.842 115.172,115.279 116.729,114.634 118.251,113.908 119.732,113.104 121.17,112.223 122.559,111.268 123.897,110.242 125.178,109.147 126.401,107.986 127.562,106.763 128.657,105.482 129.683,104.144 130.638,102.755 131.519,101.317 132.323,99.836 133.049,98.314 133.694,96.757 134.257,95.168 134.735,93.551 135.129,91.912 135.436,90.254 135.656,88.583 135.788,86.902 135.833,85.217 135.788,83.532 135.656,81.851 135.436,80.18 135.129,78.522 134.735,76.883 134.257,75.266 133.694,73.677 133.049,72.12 132.323,70.598 131.519,69.117 130.638,67.679 129.683,66.29 128.657,64.952 127.562,63.671 126.401,62.448 125.178,61.287 123.897,60.192 122.559,59.166 121.17,58.211 119.732,57.33 118.251,56.526 116.729,55.8 115.172,55.155 113.583,54.592 111.966,54.114 110.327,53.72 108.669,53.413 106.998,53.193 105.317,53.061 103.632,53.016 101.947,53.061 100.266,53.193 98.595,53.413 96.937,53.72 95.298,54.114 93.681,54.592 92.092,55.155 90.535,55.8 89.013,56.526 87.532,57.33 86.094,58.211 84.705,59.166 83.367,60.192 82.086,61.287 80.863,62.448 79.702,63.671 78.607,64.952 77.581,66.29 76.626,67.679 75.745,69.117 74.941,70.598 74.215,72.12 73.57,73.677 73.007,75.266 72.529,76.883 72.135,78.522 71.828,80.18 71.608,81.851 71.476,83.532 71.431,85.217 71.476,86.902 71.608,88.583 71.828,90.254 72.135,91.912 72.529,93.551 73.007,95.168 73.57,96.757 74.215,98.314 74.941,99.836 75.745,101.317 76.626,102.755 77.581,104.144 78.607,105.482 79.702,106.763 80.863,107.986 82.086,109.147 83.367,110.242 84.705,111.268 86.094,112.223 87.532,113.104 89.013,113.908 90.535,114.634 92.092,115.279 93.681,115.842 95.298,116.32 96.937,116.714 98.595,117.021 100.266,117.241 101.947,117.373 103.632,117.418

## Keep-outs
Keep-Out Layer:
  circle w0.254: c103.643,85.217 r32.7

## Other copper
Top Layer:
  pour cut-out: 79.502,87.247 81.915,87.247 81.915,86.233 81.888,86.17 81.697,85.979 79.502,85.979
  pour cut-out: 99.695,79.756 107.569,79.756 107.569,70.104 99.822,70.104
Signal Layer 1:
  text "抄板烂鸡鸡哦！" at 113.03,64.008 h2
Internal Plane 1 (plane layer: these items are gaps in the copper):
  rectangle: 118.237,94.615 120.396,97.028
  lines w0.254: 88.265,107.061 89.154,106.172 89.916,106.172 91.44,104.648 91.44,98.298 91.821,97.917 94.361,97.917 94.869,98.425 94.869,107.95 92.329,110.49 89.027,110.49 88.265,109.728 88.265,107.061 ; 88.392,87.249 90.043,85.598 90.043,82.804 89.281,82.042 89.281,79.756 89.535,79.502 93.091,79.502 93.98,80.391 93.98,82.804 91.821,84.963 91.821,90.424 91.186,91.059 88.9,91.059 88.392,90.551 88.392,87.249 ; 116.967,85.598 116.967,87.63 117.221,87.884 121.539,87.884 122.428,88.773 122.428,96.901 123.19,97.663 127.381,97.663 128.397,96.647 128.397,79.375 128.143,79.121 126.619,79.121 126.111,78.613 126.111,76.962 125.984,76.835 124.714,76.835 124.333,77.216 124.333,79.883 125.095,80.645 125.095,82.423 122.301,85.217 117.348,85.217 116.967,85.598

## Silkscreen, mask and mechanical layers (free items; w line width, h text height)
Top Overlay:
  rectangle: 97.198,99.395 97.536,99.995
  lines w0.254: 85.471,91.059 85.471,101.473 91.44,101.473 91.44,91.059 ; 86.106,89.662 86.106,101.346 ; 93.293,100.598 92.393,99.698 92.423,83.439 96.012,83.439 ; 94.486,109.603 96.136,111.252 110.15,111.252 ; 111.282,83.409 120.777,83.409 ; 114.681,97.282 120.793,97.282 120.793,85.852 ; 116.332,100.711 116.078,100.711 116.078,105.791 123.825,105.791 123.825,100.584 123.571,100.584 ; 122.047,82.423 122.047,92.978 122.095,93.026 128.095,93.026 128.095,82.502 128.016,82.423 ; 122.936,81.026 122.936,92.964
  text "CM/S Board" at 98.933,111.76 h1.8
  text "CK" at 97.536,107.696 h1.8
  text "DA" at 100.076,107.696 h1.8
  text "INT" at 102.87,107.696 h1.8
  text "EN" at 105.537,107.696 h1.8
  text "CH-" at 85.471,106.934 h1.8
  text "BC" at 117.348,104.14 h1.8
  text "B-" at 120.777,104.14 h1.8
  text "1m00" at 87.884,103.251 h1.78
  text "P" at 105.41,102.87 h1.6
  text "V" at 106.68,102.87 h1.6
  text "T" at 108.204,102.87 h1.6
  text "BALCMD" at 116.713,100.076 h1.8
  text "40" at 100.838,99.441 h1.14
  text "31" at 105.41,99.314 h1.14
  text "1" at 100.33,97.917 h1.14 r90
  text "N" at 106.807,97.917 h1.6
  text "CM/S HB" at 120.523,97.79 h1.8
  text "B+" at 128.27,94.742 h1.8 r90
  text "21" at 106.68,94.488 h1.14 r270
  text "10" at 100.33,93.98 h1.14 r90
  text "B+" at 115.951,93.345 h1.8
  text "G" at 118.745,93.345 h1.8
  text "11" at 100.838,92.456 h1.14
  text "20" at 105.41,92.456 h1.14
  text "VTC" at 96.139,92.202 h1.8 r90
  text "D" at 98.933,92.075 h1.4
  text "DFEx-GT96" at 80.518,91.821 h1.8 r90
  text "HyperCharge" at 84.455,91.694 h1.8 r90
  text "35V220uF" at 89.662,90.932 h2.3 r90
  text "B-" at 94.996,90.424 h1.8
  text "140W PD(15A)" at 109.601,88.138 h1.8
  text "ISP" at 96.012,87.503 h1.8 r90
  text "HyperCharge" at 109.982,86.487 h1.8
  text "H1" at 99.314,85.725 h2.03 r90
  text "L1" at 101.727,85.725 h2.03 r90
  text "H2" at 109.093,85.725 h2.03 r90
  text "L2" at 106.807,85.598 h2.03 r90
  text "ISN" at 96.012,84.582 h1.8 r90
  text "Type-C" at 78.74,82.804 h1.8 r90
  text "16V680uF" at 125.984,82.677 h2.3 r90
  text "L028" at 91.567,80.137 h1.6
  text "EPC1770-100M-TP" at 97.917,80.01 h1.4
  text "L028" at 113.792,79.756 h1.6 r90
  text "2M50" at 121.666,77.597 h1.78
  text "5M0" at 122.047,76.073 h1.78
  text "DFEx-FarBeaMon3tr" at 130.81,75.438 h3 r90
  text "2M50" at 81.661,74.93 h1.78
  text "5M0" at 81.915,73.406 h1.78
  text "Designed" at 119.507,72.136 h2.5
  text "By:" at 116.332,70.358 h1.8
  text "抄板死全家" at 105.537,69.85 h1.4 r90
  text "EPC1265-100M" at 101.6,68.707 h1.4 r90
  text "奸商户口本只剩一页" at 107.188,67.564 h1.4 r90
  text "JLCJLCJLCJLC" at 103.886,67.31 h1.8 r90
  text "Ver1.3a" at 116.84,66.167 h1.8
  text "25/08/09" at 116.586,64.516 h1.8
  text "L028" at 102.108,62.23 h1.4
Bottom Overlay:
  circle w0.254: c87.503,86.741 r1.024
  circle w0.254: c88.646,83.185 r0.635
  circle w0.254: c86.36,83.185 r0.635
  rectangle: 86.36,83.185 88.646,86.741
  rectangle: 112.649,88.9 113.157,89.408
  rectangle: 118.007,75.646 118.364,76.246
  rectangle: 96.093,102.64 96.693,102.997
  region: 88.011,83.185 ccw(c88.646,83.185) 88.646,82.55 ccw(c88.646,83.185) 89.281,83.185 ccw(c88.646,83.185) 88.646,83.82 ccw(c88.646,83.185)
  region: 85.725,83.185 ccw(c86.36,83.185) 86.36,82.55 ccw(c86.36,83.185) 86.995,83.185 ccw(c86.36,83.185) 86.36,83.82 ccw(c86.36,83.185)
  region: 86.479,86.741 ccw(c87.503,86.741) 87.503,85.717 ccw(c87.503,86.741) 88.527,86.741 ccw(c87.503,86.741) 87.503,87.765 ccw(c87.503,86.741)
  lines w0.254: 97.377,86.487 95.123,86.487 95.123,85.725 95.123,82.677 96.139,82.677 113.157,82.677 113.157,86.614 110.871,86.614 ; 97.536,93.472 96.774,93.472 96.774,88.138 107.696,88.138 107.696,88.646 107.696,92.583 107.696,93.472 106.807,93.472 ; 97.663,109.982 93.345,109.982 93.345,94.742 99.06,94.742 99.06,96.266 ; 99.06,107.569 99.06,108.839 ; 99.441,76.073 99.441,68.453 107.061,68.453 107.061,66.675 118.491,66.675 118.491,73.406 121.412,73.406 121.412,79.883 119.761,79.883 119.761,80.645 119.761,80.899 ; 102.235,76.962 117.348,76.962 ; 104.14,101.219 103.505,101.219 103.505,107.696 109.855,107.696 109.855,101.346 108.966,101.346 ; 112.141,86.614 112.141,93.98 119.761,93.98 119.761,89.916 ; 102.235,76.327 102.235,81.534 117.348,81.534 117.348,76.327 102.235,76.327
  text "CM/S AUXPSU" at 99.695,107.315 h1.78 r90
  text "CHG-" at 87.122,106.299 h1.8 r270
  text "BALEN" at 116.84,102.235 h1.8
  text "B-" at 123.825,102.108 h1.8
  text "IPDCTL" at 108.585,100.838 h1.4
  text "+" at 117.348,97.79 h2.03 r90
  text "B+" at 122.047,94.869 h1.8 r270
  text "Type-C Monitor" at 106.553,93.091 h1.4
  text "+" at 90.424,91.567 h2.03 r90
  text "CCSEL Control" at 120.142,89.535 h1.4 r90
  text "CM/S PassThrough" at 110.49,86.106 h1.65
  text "烫" at 104.013,83.693 h1.65
  text "+" at 103.632,80.645 h1.78 r90
  text "+" at 126.873,79.375 h1.4 r90
  text "35V 470uF" at 113.919,78.359 h1.91
  text "-" at 103.251,77.343 h1.78
  text "G6KU-2F-Y-TR" at 116.967,71.374 h1.4
  text "5VDC Coil" at 115.697,69.85 h1.4
Top Solder:
  circle w2.7: c103.854,84.965 r31.45
  region: 120.656,108.623 122.174,111.252 116.961,114.262 115.443,111.633
  rectangle: 71.374,82.169 74.803,88.265
  rectangle: 114.173,72.517 117.094,73.787
  rectangle: 106.172,59.182 107.442,62.23
  rectangle: 99.822,58.039 101.092,60.96
  rectangle: 88.9,72.517 91.948,73.787
  rectangle: 86.106,83.312 87.884,85.09
  rectangle: 119.38,59.944 122.936,62.103
  rectangle: 118.11,61.468 124.714,63.5
  rectangle: 114.3,56.515 118.999,63.5
  rectangle: 85.09,58.801 89.408,61.595
  rectangle: 82.677,60.96 88.9,63.627
  rectangle: 88.265,56.515 93.345,63.627
  lines w0.5: 80.556,82.717 83.308,82.717 ; 80.556,87.717 83.479,87.717 ; 83.058,82.717 84.749,82.717 85.09,83.058 85.09,87.376 84.749,87.717 83.185,87.717 ; 85.09,83.566 86.741,83.566 87.122,83.947 87.122,84.709
  lines w1: 100.584,59.436 101.854,59.436 102.108,59.69 103.632,59.69 ; 103.886,59.817 105.029,59.817 106.045,60.833 106.934,60.833
  lines w1.5: 80.645,75.184 80.645,77.47 81.026,77.851 84.963,77.851 85.217,77.851 86.36,78.994 86.36,80.391 86.868,80.899 89.662,80.899 90.678,81.915 90.678,83.566 90.678,87.376 89.789,88.265 89.789,89.662 ; 90.424,73.025 90.424,71.12 91.186,70.358 96.139,70.358 ; 111.887,69.596 114.427,69.596 115.316,70.485 115.316,72.771
  lines w2: 81.788,92.583 81.788,100.965 84.455,103.632 86.233,103.632 ; 89.916,108.331 94.107,108.331 95.631,106.807 95.631,104.14 95.123,103.632 93.599,103.632 ; 126.365,81.026 126.365,80.391 127,79.756 127,78.105
  text "Redstoner_35" at 118.618,70.231 h2.79
Bottom Solder:
  lines w1: 78.232,78.359 78.232,77.343 79.629,75.946 85.979,75.946 87.122,74.803 95.123,74.803 96.393,73.533 96.393,61.595 98.298,59.69 103.632,59.69
  lines w2: 125.222,95.631 125.222,85.725 126.365,84.582 126.365,81.026
Mechanical 1:
  circle w0.254: c103.643,85.217 r32.7
  circle w0.254: c74.632,85.217 r2.5
  circle w0.254: c118.132,110.332 r2.5
  circle w0.254: c118.132,60.102 r2.5
  circle w0.254: c98.683,109.809 r0.45
  circle w0.254: c93.893,90.979 r0.45
  circle w0.254: c93.893,88.439 r0.45
  circle w0.254: c93.893,85.899 r0.45
  circle w0.254: c116.753,95.709 r0.45
  circle w0.254: c101.223,109.809 r0.45
  circle w0.254: c103.763,109.809 r0.45
  circle w0.254: c106.303,109.809 r0.45
  circle w0.254: c93.893,93.519 r0.45
  circle w0.254: c119.293,95.709 r0.45
  lines w0.254: 79.432,79.217 84.432,79.217 84.432,91.217 79.432,91.217 79.432,79.217 ; 88.482,73.017 93.482,73.017 93.482,79.017 88.482,79.017 88.482,73.017 ; 94.632,57.602 94.632,62.602 100.632,62.602 100.632,57.602 94.632,57.602 ; 94.882,64.517 94.882,81.517 112.382,81.517 112.382,64.517 94.882,64.517 ; 106.632,57.602 106.632,62.602 112.632,62.602 112.632,57.602 106.632,57.602 ; 113.782,73.017 113.782,79.017 118.782,79.017 118.782,73.017 113.782,73.017
Mechanical 4:
  circle w0.254: c103.643,85.217 r32.7
  circle w0.254: c118.072,110.299 r1.6
  circle w0.254: c74.632,85.217 r1.6
  circle w0.254: c118.132,110.332 r1.6
  circle w0.254: c118.132,60.102 r1.6
  lines w0.254: 73.406,80.391 cw(c75.213,80.54) 74.583,82.24 ; 73.415,80.392 ccw(c103.632,85.217) 81.552,64.031 ccw(c83.566,66.04) 83.439,63.198 ; 74.434,82.224 ccw(c74.632,85.217) 74.554,88.216 ; 74.595,88.213 cw(c75.225,89.913) 73.418,90.061 cw(c103.632,85.217) 114.52,113.814 cw(c113.749,112.173) 115.536,111.869 ; 83.439,63.194 92.456,63.194 cw(c92.456,62.178) 93.472,62.178 93.472,57.658 ccw(c94.488,57.658) 94.488,56.642 113.284,56.642 ; 91.694,63.194 115.951,63.194 ; 113.157,56.642 ccw(c113.157,57.658) 114.173,57.658 114.173,62.178 cw(c115.189,62.178) 115.189,63.194 123.698,63.194 ; 115.578,111.968 ccw(c118.072,110.299) 120.708,108.868 ; 120.532,108.704 cw(c121.878,107.49) 122.914,108.978 cw(c103.632,85.217) 125.77,64.091 cw(c123.571,66.294) 123.571,63.182

## Text inside footprints (layer, text, board x,y; h text height)
C4: Top Overlay "+" at 91.059,90.805 h1.27 r180
C12: Top Overlay "+" at 127.635,82.169 h1.27 r180